# EAGLE board nutzen_05_mil (EAGLE 9.6.2), part 1 of 2
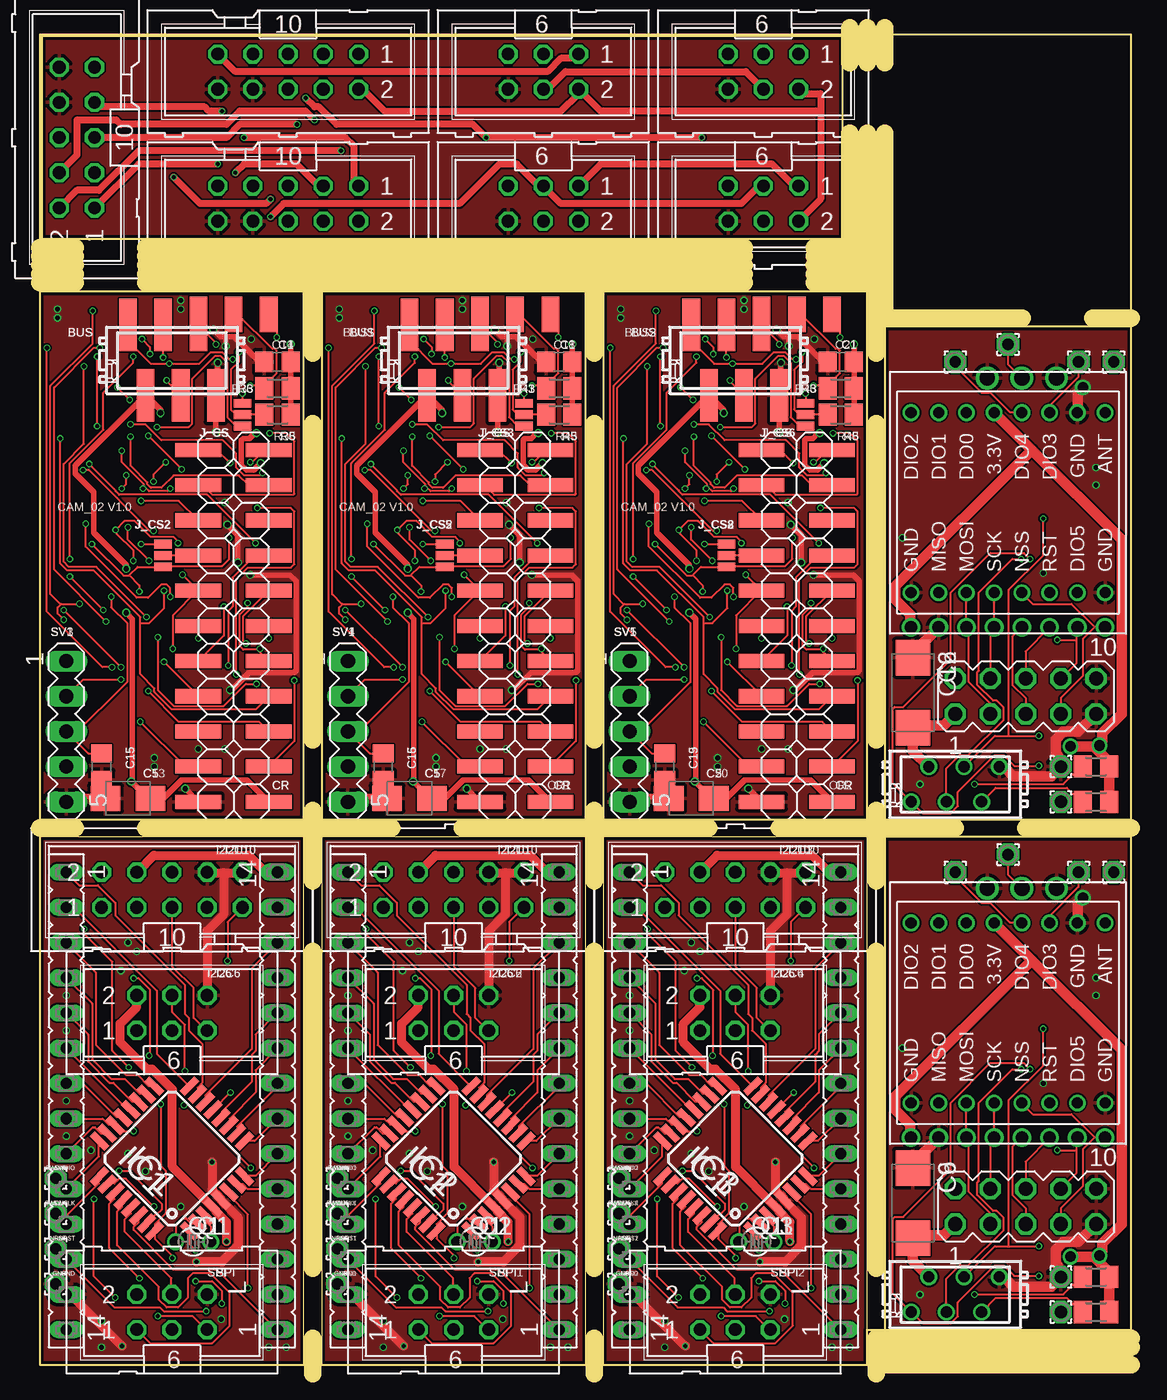
[diagram p0: board, top side]
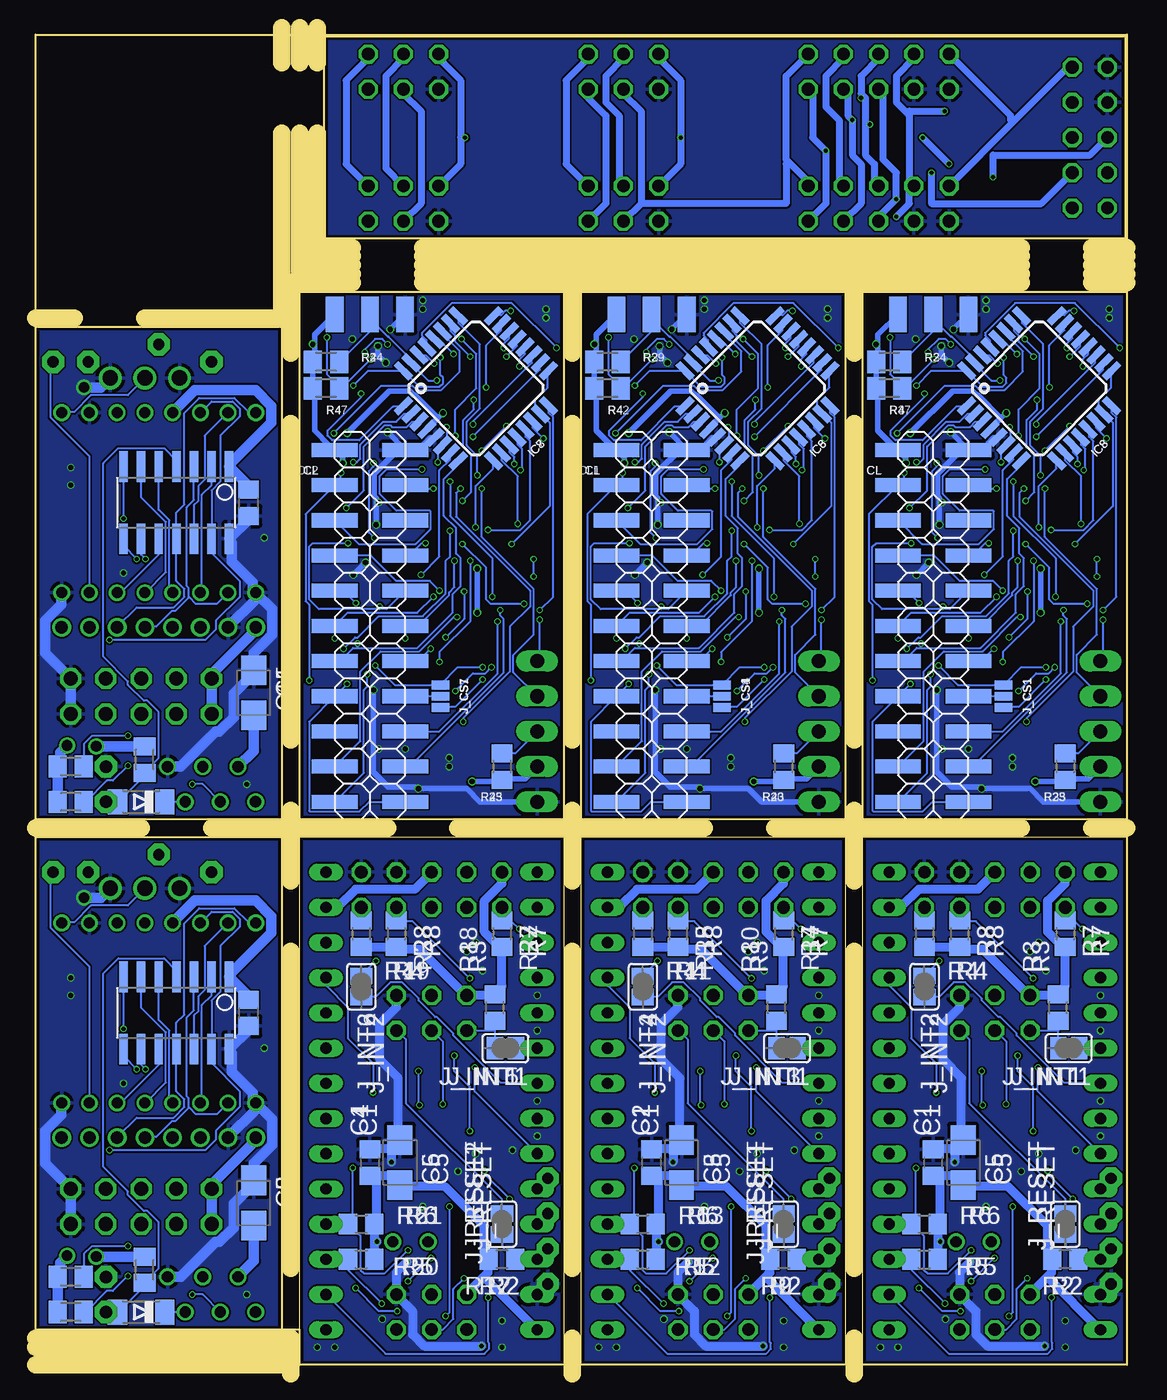
[diagram p1: board, bottom side, seen from below]

Size 78.74 x 96.01 mm. Coordinates in mm from the lower left corner, seen from the top.
Outline: 0,0 0,38.1 19.05,38.1 19.05,0 0,0
Outline: 59.69,0 40.64,0 40.64,38.1 59.69,38.1 59.69,2.54
Outline: 78.74,38.1 78.74,2.54 60.96,2.54
Outline: 78.74,38.1 60.96,38.1 60.96,2.54
Outline: 78.74,39.37 78.74,74.93 60.96,74.93
Outline: 60.96,74.93 60.96,39.37 78.74,39.37
Outline: 0,39.37 19.05,39.37 19.05,77.47 0,77.47
Outline: 0,77.47 0,39.37
Outline: 59.69,77.47 59.69,39.37 40.64,39.37 40.64,77.47 57.91,77.47
Outline: 59.69,77.47 57.91,77.47
Outline: 57.91,81.28 0.13,81.28 0.13,95.89
Outline: 57.91,81.28 57.91,95.89 0.13,95.89
Outline: 0,0 59.69,0
Outline: 59.69,0 59.69,2.54
Outline: 59.69,2.54 60.96,2.54
Outline: 78.74,38.1 78.74,39.37
Outline: 60.96,74.93 60.96,77.47 59.69,77.47
Outline: 57.91,77.47 57.91,81.28
Outline: 0.13,95.89 0,95.89
Outline: 0,95.89 0,77.47
Outline: 0,39.37 0,0
Outline: 59.69,0 78.74,0 78.74,96.01 0,96.01 0,95.89
Outline: 39.37,38.1 20.32,38.1 20.32,0 39.37,0 39.37,38.1
Outline: 20.32,39.37 39.37,39.37 39.37,77.47 20.32,77.47 20.32,39.37
Copper layers (1*16): Top 0.035559375mm / dielectric 1.6mm / Bottom 0.035559375mm
Design rules "jlcpcb2layer": minimum track width 5mil, minimum drill 12mil, track to track 5mil, track to pad 5mil, pad to pad 5mil, via to via 5mil, smd to smd 5mil, copper to edge 8mil, drill to drill 6mil, minimum pad ring 5mil, minimum via ring 3mil, stop-mask expansion 2.5mil, vias tented up to drill 0mil, thermal gap 10mil
Net classes: 1 GND: width 0.635 mm; 2 Power: width 0.635 mm
Milling: 46 lines

## Footprints (pad centres in the part's own frame; a part is rotated, then mirrored left to right if it is on the bottom)
MICROMATCH-6SMD = smd 1.27 x 3.81: 1 3.175,-2.54; 2 1.905,2.54; 3 0.635,-2.54; 4 -0.635,2.54; 5 -1.905,-2.54; 6 -3.175,2.54
C0805 = smd 1.3 x 1.5: 1 -0.95,0; 2 0.95,0
B/3528-21W = smd 2.15 x 1.8: + 1.625,0; - -1.625,0
C/6032-28R = smd 2.55 x 2.5: + 2.525,0; - -2.525,0
2X11SMD = smd 1.016 x 3.302: 1 -1.27,-3.81; 2 -1.27,1.27; 3 1.27,-3.81; 4 1.27,1.27; 5 3.81,-3.81; 6 3.81,1.27; 7 6.35,-3.81; 8 6.35,1.27; 9 8.89,-3.81; 10 8.89,1.27; 11 11.43,-3.81; 12 11.43,1.27; 13 13.97,-3.81; 14 13.97,1.27; 15 16.51,-3.81; 16 16.51,1.27; 17 19.05,-3.81; 18 19.05,1.27; 19 21.59,-3.81; 20 21.59,1.27; 21 24.13,-3.81; 22 24.13,1.27
MINIMELF = smd 1.4 x 1.8: A 1.7,0; C -1.7,0
1,6/0,9 = drill 0.914 pad 1.6 octagon: 1 0,0
1,6/0,8 = drill 0.813 pad 1.6 octagon: 1 0,0
ML10 = drill 0.914 octagon: 1 -5.08,-1.27; 2 -5.08,1.27; 3 -2.54,-1.27; 4 -2.54,1.27; 5 0,-1.27; 6 0,1.27; 7 2.54,-1.27; 8 2.54,1.27; 9 5.08,-1.27; 10 5.08,1.27
ML6 = drill 0.914 octagon: 1 -2.54,-1.27; 2 -2.54,1.27; 3 0,-1.27; 4 0,1.27; 5 2.54,-1.27; 6 2.54,1.27
LQFP-32 = smd 1.5 x 0.5: 1 -1.8,0; 2 -1.8,-0.8; 3 -1.8,-1.6; 4 -1.8,-2.4; 5 -1.8,-3.2; 6 -1.8,-4; 7 -1.8,-4.8; 8 -1.8,-5.6; 17 7.4,-5.6; 18 7.4,-4.8; 19 7.4,-4; 20 7.4,-3.2; 21 7.4,-2.4; 22 7.4,-1.6; 23 7.4,-0.8; 24 7.4,0 | smd 0.5 x 1.5: 9 0,-7.4; 10 0.8,-7.4; 11 1.6,-7.4; 12 2.4,-7.4; 13 3.2,-7.4; 14 4,-7.4; 15 4.8,-7.4; 16 5.6,-7.4; 25 5.6,1.8; 26 4.8,1.8; 27 4,1.8; 28 3.2,1.8; 29 2.4,1.8; 30 1.6,1.8; 31 0.8,1.8; 32 0,1.8
SOIC14 = smd 0.61 x 2.21: 1 -3.81,-2.603; 2 -2.54,-2.603; 3 -1.27,-2.603; 4 0,-2.603; 5 1.27,-2.603; 6 2.54,-2.603; 7 3.81,-2.603; 8 3.81,2.603; 9 2.54,2.603; 10 1.27,2.603; 11 0,2.603; 12 -1.27,2.603; 13 -2.54,2.603; 14 -3.81,2.603
SMT-JUMPER_3_1-NC_PASTE_NO-SILK = smd 0.635 x 1.27: 1 -0.813,0; 2 0,0; 3 0.813,0
SJ = smd 1.168 x 1.6: 1 -0.762,0; 2 0.762,0
FE14 = drill 0.813 long: 1 -15.24,0; 2 -12.7,0; 3 -10.16,0; 4 -7.62,0; 5 -5.08,0; 6 -2.54,0; 7 0,0; 8 2.54,0; 9 5.08,0; 10 7.62,0; 11 10.16,0; 12 12.7,0; 13 15.24,0; 14 17.78,0
SMD1,27-2,54 = smd 1.27 x 2.54: 1 0,0
TC26V = drill 0.813: 1 -1.27,0; 2 1.27,0
R0805 = smd 1.3 x 1.5: 1 -0.95,0; 2 0.95,0
M0805 = smd 1.3 x 1.6: 1 -0.95,0; 2 0.95,0
MA05-2 = drill 1.016 octagon: 1 -5.08,-1.27; 2 -5.08,1.27; 3 -2.54,-1.27; 4 -2.54,1.27; 5 0,-1.27; 6 0,1.27; 7 2.54,-1.27; 8 2.54,1.27; 9 5.08,-1.27; 10 5.08,1.27
MA05-1 = drill 1.016 long: 1 -5.08,0; 2 -2.54,0; 3 0,0; 4 2.54,0; 5 5.08,0
CC1101 = drill 1.1: ANT 9,-1; GND1 9,-3.5; GND2 9,1.5 | drill 0.9: CSN -9,-7; GDO0 -9,-5; GDO2 -9,-3; GND0 -9,5; SCLK -9,1; SI -9,3; SO -9,-1; VCC -9,7
WIRELESS-LORA-RFM95W#THT = drill 0.8: A1 -6.5,7; A2 -6.5,5; A3 -6.5,3; A4 -6.5,1; A5 -6.5,-1; A6 -6.5,-3; A7 -6.5,-5; A8 -6.5,-7; B1 6.5,7; B2 6.5,5; B3 6.5,3; B4 6.5,1; B5 6.5,-1; B6 6.5,-3; B7 6.5,-5; B8 6.5,-7
MICROMATCH-6 = drill 0.813: 1 3.175,1.27; 2 1.905,-1.27; 3 0.635,1.27; 4 -0.635,-1.27; 5 -1.905,1.27; 6 -3.175,-1.27

## Placement (x,y rotation side)
BUS  [MICROMATCH-6SMD]  9.53,72.52 180 top
BUS1  [MICROMATCH-6SMD]  29.84,72.52 180 top
BUS2  [MICROMATCH-6SMD]  50.16,72.52 180 top
C1  [C0805]  13.97,14.61 90 bottom
C2  [C0805]  34.29,14.61 90 bottom
C3  [B/3528-21W]  32.13,14.61 270 bottom
C4  [C0805]  54.61,14.61 90 bottom
C5  [B/3528-21W]  11.81,14.61 270 bottom
C6  [B/3528-21W]  52.45,14.61 270 bottom
C7  100n  [C0805]  63.37,25.4 270 bottom
C8  10u  [B/3528-21W]  62.99,11.68 270 bottom
C9  [C/6032-28R]  62.99,11.68 270 top
C10  100n  [C0805]  63.37,62.23 270 bottom
C11  10u  [B/3528-21W]  62.99,48.51 270 bottom
C12  [C/6032-28R]  62.99,48.51 270 top
C13  10u  [B/3528-21W]  6.35,40.89 0 top
C14  0.1  [C0805]  17.14,72.39 180 top
C15  0.1  [C0805]  4.45,43.18 270 top
C16  0.1  [C0805]  24.77,43.18 270 top
C17  10u  [B/3528-21W]  26.67,40.89 0 top
C18  0.1  [C0805]  37.47,72.39 180 top
C19  0.1  [C0805]  45.09,43.18 270 top
C20  10u  [B/3528-21W]  46.99,40.89 0 top
C21  0.1  [C0805]  57.78,72.39 180 top
CL  [2X11SMD]  12.7,64.77 270 bottom
CL1  [2X11SMD]  33.02,64.77 270 bottom
CL2  [2X11SMD]  53.34,64.77 270 bottom
CR  [2X11SMD]  12.7,41.91 90 top
CR1  [2X11SMD]  33.02,41.91 90 top
CR2  [2X11SMD]  53.34,41.91 90 top
D1  [MINIMELF]  71.12,40.64 180 bottom
D2  [MINIMELF]  71.12,3.81 180 bottom
DW  [1,6/0,9]  73.66,3.81 90 top
DW1  [1,6/0,9]  73.66,40.64 90 top
GND  [1,6/0,8]  1.14,5.84 180 top
GND1  [1,6/0,8]  21.46,5.84 180 top
GND2  [1,6/0,8]  41.78,5.84 180 top
GND_  [1,6/0,9]  73.66,6.35 90 top
GND_1  [1,6/0,9]  73.66,43.18 90 top
I2C1  [ML10]  29.84,34.29 0 top
I2C2  [ML6]  29.84,25.4 0 top
I2C3  [ML10]  50.16,34.29 0 top
I2C4  [ML6]  50.16,25.4 0 top
I2C6  [ML6]  9.53,25.4 0 top
I2C10  [ML10]  9.53,34.29 0 top
IC1  STM32G071  [LQFP-32]  9.53,10.92 135 top
IC2  STM32G071  [LQFP-32]  29.84,10.92 135 top
IC3  STM32G071  [LQFP-32]  50.16,10.92 135 top
IC4  TINY84 or TINY841  [SOIC14]  68.58,25.4 180 bottom
IC5  TINY84 or TINY841  [SOIC14]  68.58,62.23 180 bottom
IC6  STM32G071KBT6N  [LQFP-32]  30.61,70.48 45 bottom
IC7  STM32G071KBT6N  [LQFP-32]  50.93,70.48 45 bottom
IC8  STM32G071KBT6N  [LQFP-32]  10.29,70.48 45 bottom
J_CS  [SMT-JUMPER_3_1-NC_PASTE_NO-SILK]  14.61,68.58 270 top
J_CS1  [SMT-JUMPER_3_1-NC_PASTE_NO-SILK]  8.89,48.26 90 bottom
J_CS2  [SMT-JUMPER_3_1-NC_PASTE_NO-SILK]  8.89,58.42 270 top
J_CS3  [SMT-JUMPER_3_1-NC_PASTE_NO-SILK]  34.92,68.58 270 top
J_CS4  [SMT-JUMPER_3_1-NC_PASTE_NO-SILK]  29.21,48.26 90 bottom
J_CS5  [SMT-JUMPER_3_1-NC_PASTE_NO-SILK]  29.21,58.42 270 top
J_CS6  [SMT-JUMPER_3_1-NC_PASTE_NO-SILK]  55.24,68.58 270 top
J_CS7  [SMT-JUMPER_3_1-NC_PASTE_NO-SILK]  49.53,48.26 90 bottom
J_CS8  [SMT-JUMPER_3_1-NC_PASTE_NO-SILK]  49.53,58.42 270 top
J_INT1  [SJ]  4.19,22.86 0 bottom
J_INT2  [SJ]  14.61,27.3 270 bottom
J_INT3  [SJ]  24.51,22.86 0 bottom
J_INT4  [SJ]  34.92,27.3 270 bottom
J_INT5  [SJ]  44.83,22.86 0 bottom
J_INT6  [SJ]  55.24,27.3 270 bottom
J_RESET  [SJ]  4.45,10.16 270 bottom
J_RESET1  [SJ]  24.77,10.16 270 bottom
J_RESET2  [SJ]  45.09,10.16 270 bottom
L  [FE14]  17.14,17.78 90 top
L1  [FE14]  37.47,17.78 90 top
L2  [FE14]  57.78,17.78 90 top
NRST  [1,6/0,8]  1.14,8.38 180 top
NRST1  [1,6/0,8]  21.46,8.38 180 top
NRST2  [1,6/0,8]  41.78,8.38 180 top
PAD1  [1,6/0,8]  69.85,36.83 90 top
PAD2  [1,6/0,8]  74.93,35.56 90 top
PAD3  [1,6/0,8]  66.04,35.56 90 top
PAD4  [1,6/0,8]  77.47,35.56 90 top
PAD5  [1,6/0,8]  69.85,73.66 90 top
PAD6  [1,6/0,8]  74.93,72.39 90 top
PAD7  [1,6/0,8]  66.04,72.39 90 top
PAD8  [1,6/0,8]  77.47,72.39 90 top
PAD9  [SMD1,27-2,54]  16.51,75.82 0 top
PAD10  [SMD1,27-2,54]  16.51,75.82 0 bottom
PAD11  [SMD1,27-2,54]  13.97,75.82 0 top
PAD12  [SMD1,27-2,54]  13.97,75.82 0 bottom
PAD13  [SMD1,27-2,54]  11.43,75.82 0 top
PAD14  [SMD1,27-2,54]  11.43,75.82 0 bottom
PAD15  [SMD1,27-2,54]  36.83,75.82 0 top
PAD16  [SMD1,27-2,54]  36.83,75.82 0 bottom
PAD17  [SMD1,27-2,54]  34.29,75.82 0 top
PAD18  [SMD1,27-2,54]  34.29,75.82 0 bottom
PAD19  [SMD1,27-2,54]  31.75,75.82 0 top
PAD20  [SMD1,27-2,54]  31.75,75.82 0 bottom
PAD21  [SMD1,27-2,54]  57.15,75.82 0 top
PAD22  [SMD1,27-2,54]  57.15,75.82 0 bottom
PAD23  [SMD1,27-2,54]  54.61,75.82 0 top
PAD24  [SMD1,27-2,54]  54.61,75.82 0 bottom
PAD25  [SMD1,27-2,54]  52.07,75.82 0 top
PAD26  [SMD1,27-2,54]  52.07,75.82 0 bottom
Q1  [TC26V]  11.05,8.89 180 top
Q2  [TC26V]  31.37,8.89 180 top
Q3  [TC26V]  51.69,8.89 180 top
R  [FE14]  1.91,20.32 270 top
R1  [FE14]  22.23,20.32 270 top
R2  [R0805]  4.45,7.62 180 bottom
R3  [R0805]  4.95,25.78 90 bottom
R4  [R0805]  14.61,31.11 270 bottom
R5  [R0805]  14.61,7.62 0 bottom
R6  [R0805]  14.61,10.16 0 bottom
R7  [R0805]  4.45,31.11 270 bottom
R8  [R0805]  12.06,31.11 270 bottom
R9  [R0805]  24.77,7.62 180 bottom
R10  [R0805]  25.27,25.78 90 bottom
R11  [R0805]  34.92,31.11 270 bottom
R12  [R0805]  34.92,7.62 0 bottom
R13  [R0805]  34.92,10.16 0 bottom
R14  [R0805]  24.77,31.11 270 bottom
R15  [R0805]  32.38,31.11 270 bottom
R16  [FE14]  42.55,20.32 270 top
R17  [R0805]  45.09,7.62 180 bottom
R18  [R0805]  45.59,25.78 90 bottom
R19  [R0805]  55.24,31.11 270 bottom
R20  [R0805]  55.24,7.62 0 bottom
R21  [R0805]  55.24,10.16 0 bottom
R22  [R0805]  45.09,31.11 270 bottom
R23  [R0805]  52.7,31.11 270 bottom
R24  10k  [M0805]  70.87,6.86 270 bottom
R25  10k  [M0805]  76.2,6.35 0 bottom
R26  10k  [M0805]  76.2,6.35 180 top
R27  10k  [M0805]  76.2,3.81 0 bottom
R28  10k  [M0805]  76.2,3.81 180 top
R29  10k  [M0805]  70.87,43.69 270 bottom
R30  10k  [M0805]  76.2,43.18 0 bottom
R31  10k  [M0805]  76.2,43.18 180 top
R32  10k  [M0805]  76.2,40.64 0 bottom
R33  10k  [M0805]  76.2,40.64 180 top
R34  10k  [M0805]  17.14,72.39 0 bottom
R35  100K  [R0805]  4.45,43.18 270 bottom
R36  10k  [M0805]  17.14,70.48 180 top
R37  10k  [M0805]  17.14,70.48 0 bottom
R38  10k  [M0805]  17.14,68.58 180 top
R39  10k  [M0805]  37.47,72.39 0 bottom
R40  100K  [R0805]  24.77,43.18 270 bottom
R41  10k  [M0805]  37.47,70.48 180 top
R42  10k  [M0805]  37.47,70.48 0 bottom
R43  10k  [M0805]  37.47,68.58 180 top
R44  10k  [M0805]  57.78,72.39 0 bottom
R45  100K  [R0805]  45.09,43.18 270 bottom
R46  10k  [M0805]  57.78,70.48 180 top
R47  10k  [M0805]  57.78,70.48 0 bottom
R48  10k  [M0805]  57.78,68.58 180 top
SPI  [ML6]  9.53,3.81 0 top
SPI1  [ML6]  29.84,3.81 0 top
SPI2  [ML6]  50.16,3.81 0 top
SV1  [MA05-2]  71.12,11.43 0 top
SV2  [MA05-2]  71.12,48.26 0 top
SV3  [MA05-1]  1.91,45.72 270 top
SV4  [MA05-1]  22.23,45.72 270 top
SV5  [MA05-1]  42.55,45.72 270 top
SV6  [ML6]  52.2,83.82 180 top
SV7  [ML6]  36.32,93.34 180 top
SV8  [ML10]  2.67,88.58 90 top
SV9  [ML10]  17.91,83.82 180 top
SV10  [ML6]  36.32,83.82 180 top
SV11  [ML10]  17.91,93.34 180 top
SV12  [ML6]  52.2,93.34 180 top
SWCLK  [1,6/0,8]  1.14,10.92 180 top
SWCLK1  [1,6/0,8]  21.46,10.92 180 top
SWCLK2  [1,6/0,8]  41.78,10.92 180 top
SWDIO  [1,6/0,8]  1.14,13.46 180 top
SWDIO1  [1,6/0,8]  21.46,13.46 180 top
SWDIO2  [1,6/0,8]  41.78,13.46 180 top
U$1  CC1101  [CC1101]  69.85,25.4 90 top
U$2  CC1101  [CC1101]  69.85,62.23 90 top
U$3  WIRELESS-LORA-RFM95W#THT  [WIRELESS-LORA-RFM95W#THT]  69.85,25.4 90 top
U$4  WIRELESS-LORA-RFM95W#THT  [WIRELESS-LORA-RFM95W#THT]  69.85,62.23 90 top
X1  BUS  [MICROMATCH-6]  66.04,5.08 180 top
X2  BUS  [MICROMATCH-6]  66.04,41.91 180 top

## Library data of the parts
BUS BUS1 BUS2 = con-amp-micromatch
C1-C6 C8 C9 C11-C13 C17 C20 = rcl; SPICEPREFIX: C
C7 C10 C14-C16 C18 C19 C21 R35 R40 R45 = rcl
CL CL1 CL2 CR CR1 CR2 = pinhead-1
D1 D2 = diode
DW DW1 GND GND1 GND2 GND_ GND_1 NRST NRST1 NRST2 PAD1-PAD26 SWCLK SWCLK1 SWCLK2 SWDIO SWDIO1 SWDIO2 = wirepad
I2C1-I2C4 I2C6 I2C10 SPI SPI1 SPI2 SV6-SV12 = con-harting-ml; OC_FARNELL: unknown; OC_NEWARK: unknown
IC1-IC3 IC6-IC8 = STM32
IC4 IC5 = avr-7
J_CS J_CS1-J_CS8 = SparkFun-Jumpers
J_INT1-J_INT6 J_RESET J_RESET1 J_RESET2 = jumper
L L1 L2 R R1 R16 = con-lsta-my
Q1-Q3 = crystal; OC_FARNELL: unknown; OC_NEWARK: unknown
R2-R15 R17-R34 R36-R39 R41-R44 R46-R48 = rcl; SPICEPREFIX: R
SV1-SV5 = con-lstb; OC_FARNELL: unknown; OC_NEWARK: unknown
U$1 U$2 = modules
U$3 U$4 = diy-modules
X1 X2 = con-amp-micromatch; MPN: 7-215464-6; OC_FARNELL: 3784630; OC_NEWARK: 19R8125

## Nets
BUS_INT: IC4.8 R27.2 X1.1
BUS_INT1: IC5.8 R32.2 X2.1
BUS_P1: BUS1.5 J_CS3.2 PAD19.1 R43.2
BUS_P2: BUS2.5 J_CS6.2 PAD25.1 R48.2
BUS_P5: BUS.5 J_CS.2 PAD13.1 R38.2
BUS_RESET: I2C6.5 I2C10.5 J_RESET.1
BUS_RESET1: I2C1.5 I2C2.5 J_RESET1.1
BUS_RESET2: I2C3.5 I2C4.5 J_RESET2.1
BUS_RESET3: D2.C R28.2 X1.5
BUS_RESET4: D1.C R33.2 X2.5
BUS_SCL: IC4.9 R26.2 X1.3
BUS_SCL1: IC5.9 R31.2 X2.3
BUS_SDA: IC4.7 R25.2 X1.4
BUS_SDA1: IC5.7 R30.2 X2.4
C_D0: CL.14 CR.14 IC8.7
C_D1: CL.13 CR.13 IC8.8
C_D2: CL.12 CR.12 IC8.9
C_D3: CL.11 CR.11 IC8.10
C_D4: CL.10 CR.10 IC8.11
C_D5: CL.9 CR.9 IC8.12
C_D6: CL.8 CR.8 IC8.13
C_D7: CL.7 CR.7 IC8.14
C_D8: CL1.7 CR1.7 IC6.14
C_D9: CL1.8 CR1.8 IC6.13
C_D10: CL1.9 CR1.9 IC6.12
C_D11: CL1.10 CR1.10 IC6.11
C_D12: CL1.11 CR1.11 IC6.10
C_D13: CL1.12 CR1.12 IC6.9
C_D14: CL1.13 CR1.13 IC6.8
C_D15: CL1.14 CR1.14 IC6.7
C_D16: CL2.7 CR2.7 IC7.14
C_D17: CL2.8 CR2.8 IC7.13
C_D18: CL2.9 CR2.9 IC7.12
C_D19: CL2.10 CR2.10 IC7.11
C_D20: CL2.11 CR2.11 IC7.10
C_D21: CL2.12 CR2.12 IC7.9
C_D22: CL2.13 CR2.13 IC7.8
C_D23: CL2.14 CR2.14 IC7.7
CL_OE: CL.20 IC8.26
CL_OE1: CL1.20 IC6.26
CL_OE2: CL2.20 IC7.26
CL_PWDN: CL.16 J_CS1.2
CL_PWDN1: CL1.16 J_CS4.2
CL_PWDN2: CL2.16 J_CS7.2
CL_RCK: CL.18 IC8.22
CL_RCK1: CL1.18 IC6.22
CL_RCK2: CL2.18 IC7.22
CL_RST: CL.15 CL.22 CR.22 IC8.15 IC8.17 J_CS2.3
CL_RST1: CL1.15 CL1.22 CR1.22 IC6.15 IC6.17 J_CS5.3
CL_RST2: CL2.15 CL2.22 CR2.22 IC7.15 IC7.17 J_CS8.3
CL_VSYNC: CL.5 IC8.28
CL_VSYNC1: CL1.5 IC6.28
CL_VSYNC2: CL2.5 IC7.28
CL_WR: CL.19 IC8.20
CL_WR1: CL1.19 IC6.20
CL_WR2: CL2.19 IC7.20
CL_WRST: CL.21 IC8.3
CL_WRST1: CL1.21 IC6.3
CL_WRST2: CL2.21 IC7.3
CR_OE: CR.20 IC8.27
CR_OE1: CR1.20 IC6.27
CR_OE2: CR2.20 IC7.27
CR_PWDN: CR.16 J_CS2.2
CR_PWDN1: CR1.16 J_CS5.2
CR_PWDN2: CR2.16 J_CS8.2
CR_RCK: CR.18 IC8.23
CR_RCK1: CR1.18 IC6.23
CR_RCK2: CR2.18 IC7.23
CR_RST: CR.15 IC8.16 J_CS1.3
CR_RST1: CR1.15 IC6.16 J_CS4.3
CR_RST2: CR2.15 IC7.16 J_CS7.3
CR_VSYNC: CR.5 IC8.29
CR_VSYNC1: CR1.5 IC6.29
CR_VSYNC2: CR2.5 IC7.29
CR_WR: CR.19 IC8.18
CR_WR1: CR1.19 IC6.18
CR_WR2: CR2.19 IC7.18
CR_WRST: CR.21 IC8.2
CR_WRST1: CR1.21 IC6.2
CR_WRST2: CR2.21 IC7.2
CS0: IC4.6 SV1.7 U$1.CSN U$3.A5
CS1: IC5.6 SV2.7 U$2.CSN U$4.A5
DW: D2.A DW.1 IC4.4 R24.2
DW1: D1.A DW1.1 IC5.4 R29.2
FON: SV8.3 SV9.3 SV11.3
FON1: I2C1.3
FON2: I2C10.3
FON3: I2C3.3
GND [GND]: C1.2 C5.- GND.1 I2C6.6 I2C10.8 I2C10.10 IC1.5 R.13 SPI.6
GND1 [GND]: C2.2 C3.- GND1.1 I2C1.8 I2C1.10 I2C2.6 IC2.5 R1.13 SPI1.6
GND2 [GND]: C4.2 C6.- GND2.1 I2C3.8 I2C3.10 I2C4.6 IC3.5 R16.13 SPI2.6
GND3 [GND]: C7.2 C8.- C9.- GND_.1 IC4.14 SV1.9 SV1.10 U$1.GND0 U$1.GND1 U$1.GND2 U$3.A1 U$3.A8 U$3.B7 X1.6
GND4 [GND]: C10.2 C11.- C12.- GND_1.1 IC5.14 SV2.9 SV2.10 U$2.GND0 U$2.GND1 U$2.GND2 U$4.A1 U$4.A8 U$4.B7 X2.6
GND5 [GND]: BUS.6 C13.- C14.2 C15.2 CL.2 CR.2 IC8.5 PAD14.1 SV3.5
GND6 [GND]: BUS1.6 C16.2 C17.- C18.2 CL1.2 CR1.2 IC6.5 PAD20.1 SV4.5
GND7 [GND]: BUS2.6 C19.2 C20.- C21.2 CL2.2 CR2.2 IC7.5 PAD26.1 SV5.5
GND8: SV6.6 SV7.6 SV8.8 SV8.10 SV9.8 SV9.10 SV10.6 SV11.8 SV11.10 SV12.6
GPIO0: IC4.13 SV1.8 U$1.GDO0 U$3.B3
GPIO1: IC4.12 U$3.B2
GPIO2: IC4.11 SV1.6 U$1.GDO2 U$3.B1
GPIO3: IC5.13 SV2.8 U$2.GDO0 U$4.B3
GPIO4: IC5.11 SV2.6 U$2.GDO2 U$4.B1
GPIO5: IC5.12 U$4.B2
INT: SV6.1 SV7.1 SV8.9 SV9.9 SV10.1 SV11.9 SV12.1
INT1: I2C6.1 J_INT1.1 R3.1
INT2: I2C10.9 J_INT2.1 R4.1
INT3: I2C2.1 J_INT3.1 R10.1
INT4: I2C1.9 J_INT4.1 R11.1
INT5: I2C4.1 J_INT5.1 R18.1
INT6: I2C3.9 J_INT6.1 R19.1
MISO: IC4.3 SV1.5 U$1.SO U$3.A2
MISO1: IC5.3 SV2.5 U$2.SO U$4.A2
MOSI: IC4.2 SV1.3 U$1.SI U$3.A3
MOSI1: IC5.2 SV2.3 U$2.SI U$4.A3
N$1: IC2.2 Q2.2
N$2: IC2.3 Q2.1
N$3: IC3.2 Q3.2
N$4: IC3.3 Q3.1
N$5: PAD1.1 U$1.ANT U$3.B8
N$6: PAD2.1 U$3.B6
N$7: PAD3.1 U$3.B5
N$8: PAD4.1 U$3.A7
N$9: PAD5.1 U$2.ANT U$4.B8
N$10: PAD6.1 U$4.B6
N$11: PAD7.1 U$4.B5
N$12: PAD8.1 U$4.A7
N$30: IC1.2 Q1.2
N$31: IC1.3 Q1.1
NRST: IC1.6 J_RESET.2 NRST.1 R2.1 R.12
NRST1: IC2.6 J_RESET1.2 NRST1.1 R1.12 R9.1
NRST2: IC3.6 J_RESET2.2 NRST2.1 R16.12 R17.1
PA0: IC1.7 L.5
PA1: IC1.8 L.6
PA2: IC1.9 L.7
PA3: IC1.10 L.8
PA4: IC1.11 L.9
PA5: IC1.12 L.10
PA6: IC1.13 L.11
PA7: IC1.14 L.12
PA8: IC1.18 R.4
PA9: IC1.19 R.5
PA10: IC1.21 J_INT2.2 R.7
PA11: IC2.7 L1.5
PA12: IC2.8 L1.6
PA13: IC2.9 L1.7
PA14: IC2.10 L1.8
PA15: IC2.11 L1.9
PA16: IC2.12 L1.10
PA17: IC2.18 R1.4
PA18: IC2.19 R1.5
PA19: IC2.13 L1.11
PA20: IC2.14 L1.12
PA21: IC2.21 J_INT4.2 R1.7
PA22: IC3.7 L2.5
PA23: IC3.8 L2.6
PA24: IC3.9 L2.7
PA25: IC3.10 L2.8
PA26: IC3.11 L2.9
PA27: IC3.12 L2.10
PA28: IC3.18 R16.4
PA29: IC3.19 R16.5
PA30: IC3.13 L2.11
PA31: IC3.14 L2.12
PA32: IC3.21 J_INT6.2 R16.7
PB0: IC1.15 R.1
PB1: IC1.16 R.2
PB2: IC2.16 R1.2
PB3: IC2.17 R1.3
PB4: IC2.30 L1.1
PB5: IC2.15 R1.1
PB6: IC1.30 L.1
PB7: IC1.31 L.2
PB8: IC2.31 L1.2
PB9: IC3.16 R16.2
PB10: IC3.17 R16.3
PB11: IC3.30 L2.1
PB12: IC3.15 R16.1
PB13: IC3.31 L2.2
PB15: IC1.17 R.3
PC1: IC2.20 J_INT3.2 R1.6
PC2: IC3.20 J_INT5.2 R16.6
PC6: IC1.20 J_INT1.2 R.6
RESET: SV6.5 SV7.5 SV8.5 SV9.5 SV10.5 SV11.5 SV12.5
RESOUT: IC4.10 U$3.A6
RESOUT1: IC5.10 U$4.A6
SCK: IC4.5 SV1.4 U$1.SCLK U$3.A4
SCK1: IC5.5 SV2.4 U$2.SCLK U$4.A4
SCL: CL.3 CR.3 IC8.19
SCL1: I2C6.3 IC1.32 L.3 R5.1
SCL2: I2C10.7 IC1.22 R8.1 R.8
SCL3: I2C2.3 IC2.32 L1.3 R12.1
SCL4: I2C1.7 IC2.22 R1.8 R15.1
SCL5: I2C4.3 IC3.32 L2.3 R20.1
SCL6: I2C3.7 IC3.22 R16.8 R23.1
SCL7: CL1.3 CR1.3 IC6.19
SCL8: CL2.3 CR2.3 IC7.19
SCL9: SV6.3 SV7.3 SV8.7 SV9.7 SV10.3 SV11.7 SV12.3
SDA: CL.4 CR.4 IC8.21
SDA1: I2C6.4 IC1.1 L.4 R6.1
SDA2: I2C10.1 IC1.23 R7.1 R.9
SDA3: I2C2.4 IC2.1 L1.4 R13.1
SDA4: I2C1.1 IC2.23 R1.9 R14.1
SDA5: I2C4.4 IC3.1 L2.4 R21.1
SDA6: I2C3.1 IC3.23 R16.9 R22.1
SDA7: CL1.4 CR1.4 IC6.21
SDA8: CL2.4 CR2.4 IC7.21
SDA9: SV6.4 SV7.4 SV8.1 SV9.1 SV10.4 SV11.1 SV12.4
SPI1_MISO: IC1.28 SPI.1
SPI1_MISO1: IC2.28 SPI1.1
SPI1_MISO2: IC3.28 SPI2.1
SPI1_MOSI: IC1.29 SPI.4
SPI1_MOSI1: IC2.29 SPI1.4
SPI1_MOSI2: IC3.29 SPI2.4
SPI1_SCK: IC1.27 SPI.3
SPI1_SCK1: IC2.27 SPI1.3
SPI1_SCK2: IC3.27 SPI2.3
SPI1_SS: IC1.26 SPI.5
SPI1_SS1: IC2.26 SPI1.5
SPI1_SS2: IC3.26 SPI2.5
SPI_CS: IC8.1 J_CS.1
SPI_CS1: IC6.1 J_CS3.1
SPI_CS2: IC7.1 J_CS6.1
SPI_MISO: BUS.1 IC8.30 PAD9.1 R37.2
SPI_MISO1: BUS1.1 IC6.30 PAD15.1 R42.2
SPI_MISO2: BUS2.1 IC7.30 PAD21.1 R47.2
SPI_MOSI: BUS.4 IC8.31 PAD12.1 R34.2
SPI_MOSI1: BUS1.4 IC6.31 PAD18.1 R39.2
SPI_MOSI2: BUS2.4 IC7.31 PAD24.1 R44.2
SPI_SCK: BUS.3 IC8.32 PAD11.1 R36.2
SPI_SCK1: BUS1.3 IC6.32 PAD17.1 R41.2
SPI_SCK2: BUS2.3 IC7.32 PAD23.1 R46.2
SWCLK: IC1.25 R.11 SWCLK.1
SWCLK1: IC2.25 R1.11 SWCLK1.1
SWCLK2: IC3.25 R16.11 SWCLK2.1
SWCLK3: IC8.25 J_CS1.1 SV3.2
SWCLK4: IC6.25 J_CS4.1 SV4.2
SWCLK5: IC7.25 J_CS7.1 SV5.2
SWDIO: IC1.24 R.10 SWDIO.1
SWDIO1: IC2.24 R1.10 SWDIO1.1
SWDIO2: IC3.24 R16.10 SWDIO2.1
SWDIO3: IC8.24 J_CS2.1 SV3.1
SWDIO4: IC6.24 J_CS5.1 SV4.1
SWDIO5: IC7.24 J_CS8.1 SV5.1
SWRES: C15.1 IC8.6 J_CS.3 R35.1 SV3.3
SWRES1: C16.1 IC6.6 J_CS3.3 R40.1 SV4.3
SWRES2: C19.1 IC7.6 J_CS6.3 R45.1 SV5.3
U1 [Power]: I2C1.4 L1.14
U2 [Power]: I2C3.4 L2.14
U3.1 [Power]: BUS1.2 C17.+ C18.1 CL1.1 CR1.1 IC6.4 PAD16.1 R39.1 R40.2 R41.1 R42.1 R43.1 SV4.4
U3.2 [Power]: BUS2.2 C20.+ C21.1 CL2.1 CR2.1 IC7.4 PAD22.1 R44.1 R45.2 R46.1 R47.1 R48.1 SV5.4
U3.3 [Power]: BUS.2 C13.+ C14.1 CL.1 CR.1 IC8.4 PAD10.1 R34.1 R35.2 R36.1 R37.1 R38.1 SV3.4
U5 [Power]: I2C10.4 L.14
U14: SV8.4 SV9.4 SV11.4
U14SW: SV8.6 SV9.6 SV11.6
U33: SV6.2 SV7.2 SV8.2 SV9.2 SV10.2 SV11.2 SV12.2
UBAT [Power]: I2C10.6 L.13
UBAT1 [Power]: I2C1.6 L1.13
UBAT2 [Power]: I2C3.6 L2.13
VCC [Power]: C1.1 C5.+ I2C6.2 I2C10.2 IC1.4 R2.2 R3.2 R4.2 R5.2 R6.2 R7.2 R8.2 R.14 SPI.2
VCC1 [Power]: C2.1 C3.+ I2C1.2 I2C2.2 IC2.4 R1.14 R9.2 R10.2 R11.2 R12.2 R13.2 R14.2 R15.2 SPI1.2
VCC2 [Power]: C4.1 C6.+ I2C3.2 I2C4.2 IC3.4 R16.14 R17.2 R18.2 R19.2 R20.2 R21.2 R22.2 R23.2 SPI2.2
VCC3 [Power]: C7.1 C8.+ C9.+ IC4.1 R24.1 R25.1 R26.1 R27.1 R28.1 SV1.1 SV1.2 U$1.VCC U$3.B4 X1.2
VCC4 [Power]: C10.1 C11.+ C12.+ IC5.1 R29.1 R30.1 R31.1 R32.1 R33.1 SV2.1 SV2.2 U$2.VCC U$4.B4 X2.2

## Tracks (layer width: path | path; a pad name or v marks a point on that pad's centre or on a via)
BUS_INT  (via drill 0.3)
  Top 0.127: v72.07,6.41 70.29,6.41 69.53,7.18 68.9,7.18 66.23,4.51 66.23,3.49 65.72,2.98 63.69,2.98 X1.1 61.53,5.14 61.53,10.54 61.66,10.67 62.29,10.67 65.72,14.1 65.72,18.92 68.58,21.78 70.99,21.78 v71.44,21.34
  Bottom 0.127: R27.2 75.12,3.81 73.6,5.33 73.15,5.33 v72.07,6.41 | IC4.8 72.39,22.29 v71.44,21.34
BUS_INT1  (via drill 0.3)
  Top 0.127: v72.07,43.24 70.29,43.24 69.53,44.01 68.9,44.01 66.23,41.34 66.23,40.32 65.72,39.81 63.69,39.81 X2.1 61.53,41.97 61.53,47.37 61.66,47.5 62.29,47.5 65.72,50.93 65.72,55.75 68.58,58.61 70.99,58.61 v71.44,58.17
  Bottom 0.127: R32.2 75.12,40.64 73.6,42.16 73.15,42.16 v72.07,43.24 | IC5.8 72.39,59.12 v71.44,58.17
BUS_P1  (via drill 0.3)
  Top 0.127: R43.2 J_CS3.2 34.48,68.58 34.1,68.96 34.1,71.82 34.67,72.39 v34.67,73.09 | v33.02,73.66 33.02,73.79 BUS1.5 PAD19.1
  Bottom 0.127: v34.67,73.09 34.67,73.28 33.91,74.04 33.4,74.04 v33.02,73.66
BUS_P2  (via drill 0.3)
  Top 0.127: R48.2 J_CS6.2 54.8,68.58 54.42,68.96 54.42,71.82 54.99,72.39 v54.99,73.09 | v53.34,73.66 53.34,73.79 BUS2.5 PAD25.1
  Bottom 0.127: v54.99,73.09 54.99,73.28 54.23,74.04 53.72,74.04 v53.34,73.66
BUS_P5  (via drill 0.3)
  Top 0.127: R38.2 J_CS.2 14.16,68.58 13.78,68.96 13.78,71.82 14.35,72.39 v14.35,73.09 | v12.7,73.66 12.7,73.79 BUS.5 PAD13.1
  Bottom 0.127: v14.35,73.09 14.35,73.28 13.59,74.04 13.08,74.04 v12.7,73.66
BUS_RESET
  Top 0.127: I2C10.5 9.56,33 9.56,28.74 11.09,27.2 11.09,25.04 12,24.13 I2C6.5
  Bottom 0.127: J_RESET.1 4.46,11.98 11.37,18.89 11.37,23.5 12,24.13 I2C6.5
BUS_RESET1
  Top 0.127: I2C1.5 29.88,33 29.88,28.74 31.41,27.2 31.41,25.04 32.32,24.13 I2C2.5
  Bottom 0.127: J_RESET1.1 24.78,11.98 31.69,18.89 31.69,23.5 32.32,24.13 I2C2.5
BUS_RESET2
  Top 0.127: I2C3.5 50.2,33 50.2,28.74 51.73,27.2 51.73,25.04 52.64,24.13 I2C4.5
  Bottom 0.127: J_RESET2.1 45.1,11.98 52.01,18.89 52.01,23.5 52.64,24.13 I2C4.5
BUS_RESET3
  Top 0.127: R28.2 75.12,3.81 74.11,4.83 68.96,4.83 X1.5
  Bottom 0.127: X1.5 D2.C
BUS_RESET4
  Top 0.127: R33.2 75.12,40.64 74.11,41.66 68.96,41.66 X2.5
  Bottom 0.127: X2.5 D1.C
BUS_SCL  (via drill 0.3)
  Top 0.127: R26.2 75.12,6.35 73.85,5.08 v67.44,5.08 | v70.8,21.34 70.17,21.34 67.75,18.92 67.75,13.27 67.63,13.14 67.63,12.26 68.77,11.11 69.03,11.11 69.53,10.6 69.53,9.72 66.99,7.18 66.36,7.18 65.41,6.22 X1.3
  Bottom 0.127: v67.44,5.08 66.67,5.08 X1.3 | IC4.9 71.12,21.65 v70.8,21.34
BUS_SCL1  (via drill 0.3)
  Top 0.127: R31.2 75.12,43.18 73.85,41.91 v67.44,41.91 | v70.8,58.17 70.17,58.17 67.75,55.75 67.75,50.1 67.63,49.97 67.63,49.09 68.77,47.94 69.03,47.94 69.53,47.43 69.53,46.55 66.99,44.01 66.36,44.01 65.41,43.05 X2.3
  Bottom 0.127: v67.44,41.91 66.67,41.91 X2.3 | IC5.9 71.12,58.48 v70.8,58.17
BUS_SDA  (via drill 0.3)
  Top 0.127: 69.91,8.57 68.9,8.57 X1.4 | 69.91,8.57 v72.07,8.57 | v72.39,24.26 72.39,21.59 69.91,19.11 69.91,8.57
  Bottom 0.127: v72.07,8.57 74.68,8.57 75.25,8 R25.2 | v72.39,24.26 IC4.7
BUS_SDA1  (via drill 0.3)
  Top 0.127: 69.91,45.4 68.9,45.4 X2.4 | 69.91,45.4 v72.07,45.4 | v72.39,61.09 72.39,58.42 69.91,55.94 69.91,45.4
  Bottom 0.127: v72.07,45.4 74.68,45.4 75.25,44.83 R30.2 | v72.39,61.09 IC5.7
C_D0  (via drill 0.3)
  Top 0.127: v10.29,57.02 CR.14 11.37,55.88 9.59,54.1 v9.59,51.69
  Bottom 0.127: v10.29,57.02 8.95,58.36 8.95,64.58 8.19,65.34 8.19,65.79 IC8.7 | CL.14 10.48,50.8 v9.59,51.69
C_D1  (via drill 0.3)
  Top 0.127: CR.13 14.67,54.04 14.67,52.26 v14.86,52.07
  Bottom 0.127: 14.86,51.75 15.18,51.75 16.13,50.8 CL.13 | 14.86,51.75 10.54,51.75 8,54.29 8,55.63 7.43,56.2 7.43,58.23 7.75,58.55 7.75,60.39 8.64,61.28 8.64,63.94 7.62,64.96 7.62,65.22 IC8.8 | 14.86,51.75 v14.86,52.07
C_D2  (via drill 0.3)
  Top 0.127: v6.35,60.45 6.35,59.56 v7.87,58.04 | v11.43,52.45 CR.12
  Bottom 0.127: v6.35,60.45 6.35,63.44 5.08,64.71 5.08,65.22 IC8.9 | v7.87,58.04 7.87,56.13 8.26,55.75 8.26,55.56 10.48,53.34 CR.12 v11.43,52.45
C_D3  (via drill 0.3)
  Top 0.127: v3.3,60.71 3.3,59.05 6.99,55.37 7.81,55.37 8.76,56.33 9.14,56.33 9.4,56.07 v9.4,55.44 | v16.51,52.45 CR.11
  Bottom 0.127: v3.3,60.71 3.3,64.14 4.45,65.28 4.45,65.79 IC8.10 | v9.4,55.44 10.54,54.29 15.56,54.29 CR.11 v16.51,52.45
C_D4  (via drill 0.3)
  Top 0.127: v3.56,65.02 5.46,63.12 5.46,63.06 5.71,62.8 12.06,62.8 v15.56,59.31 | CR.10 13.27,52.64 v13.27,54.74
  Bottom 0.127: v3.56,65.02 3.56,65.53 3.87,65.85 3.87,66.36 IC8.11 | v15.56,59.31 18.1,59.31 18.35,59.05 18.35,55.24 17.65,54.55 13.27,54.55 | 13.27,54.55 12.76,54.55 CL.10 | 13.27,54.55 v13.27,54.74
C_D5  (via drill 0.3)
  Top 0.127: v3.11,64.58 3.56,64.58 7.94,60.2 v8.19,60.2 | 15.88,51.63 15.88,51.44 CR.9 | v14.99,54.99 14.99,54.74 14.41,54.17 14.41,51.88 14.67,51.63 15.88,51.63 | 15.88,51.63 v15.88,51.69
  Bottom 0.127: v3.11,64.58 2.98,64.71 2.98,66.1 3.3,66.42 3.3,66.93 IC8.12 | v8.19,60.2 8.19,58.36 8.51,58.04 8.51,55.69 10.16,54.04 13.34,54.04 14.86,52.51 15.05,52.51 v15.88,51.69 | CL.9 15.88,55.88 v14.99,54.99
C_D6  (via drill 0.3)
  Top 0.127: v9.97,59.31 9.97,59.44 9.65,59.75 8,59.75 6.86,60.9 6.1,60.9 v5.46,60.26 5.52,60.26 5.52,60.01 6.73,58.8 v6.73,58.04 | v8.95,50.74 CR.8
  Bottom 0.127: v5.46,60.26 3.11,60.26 2.41,60.96 2.41,66.67 2.73,66.99 2.73,67.5 IC8.13 | v9.97,59.31 10.22,59.31 11.11,58.42 CL.8 | v8.95,50.74 8.95,51.44 6.73,53.66 v6.73,58.04
C_D7  (via drill 0.3)
  Top 0.127: v1.46,66.86 1.46,57.85 1.97,57.34 3.87,57.34 7.24,53.98 7.24,53.53 | 7.24,53.53 7.24,49.85 8.26,48.83 8.26,48.58 9.53,47.31 15.56,47.31 CR.7 | v8.95,55.88 8.95,54.61 7.87,53.53 7.24,53.53
  Bottom 0.127: v1.46,66.86 2.22,67.63 IC8.14 | CL.7 13.91,58.42 12.06,56.58 9.65,56.58 v8.95,55.88
C_D8  (via drill 0.3)
  Top 0.127: v21.78,66.86 21.78,57.85 22.29,57.34 24.19,57.34 27.56,53.98 27.56,53.53 | 27.56,53.53 27.56,49.85 28.57,48.83 28.57,48.58 29.84,47.31 35.88,47.31 CR1.7 | v29.27,55.88 29.27,54.61 28.19,53.53 27.56,53.53
  Bottom 0.127: v21.78,66.86 22.54,67.63 IC6.14 | CL1.7 34.23,58.42 32.38,56.58 29.97,56.58 v29.27,55.88
C_D9  (via drill 0.3)
  Top 0.127: v30.29,59.31 30.29,59.44 29.97,59.75 28.32,59.75 27.18,60.9 26.42,60.9 v25.78,60.26 25.84,60.26 25.84,60.01 27.05,58.8 v27.05,58.04 | v29.27,50.74 CR1.8
  Bottom 0.127: v25.78,60.26 23.43,60.26 22.73,60.96 22.73,66.67 23.05,66.99 23.05,67.5 IC6.13 | v30.29,59.31 30.54,59.31 31.43,58.42 CL1.8 | v29.27,50.74 29.27,51.44 27.05,53.66 v27.05,58.04
C_D10  (via drill 0.3)
  Top 0.127: v23.43,64.58 23.88,64.58 28.26,60.2 v28.51,60.2 | 36.2,51.63 36.2,51.44 CR1.9 | v35.31,54.99 35.31,54.74 34.73,54.17 34.73,51.88 34.99,51.63 36.2,51.63 | 36.2,51.63 v36.2,51.69
  Bottom 0.127: v23.43,64.58 23.3,64.71 23.3,66.1 23.62,66.42 23.62,66.93 IC6.12 | v28.51,60.2 28.51,58.36 28.83,58.04 28.83,55.69 30.48,54.04 33.66,54.04 35.18,52.51 35.37,52.51 v36.2,51.69 | CL1.9 36.2,55.88 v35.31,54.99
C_D11  (via drill 0.3)
  Top 0.127: v23.88,65.02 25.78,63.12 25.78,63.06 26.04,62.8 32.38,62.8 v35.88,59.31 | CR1.10 33.59,52.64 v33.59,54.74
  Bottom 0.127: v23.88,65.02 23.88,65.53 24.19,65.85 24.19,66.36 IC6.11 | v35.88,59.31 38.42,59.31 38.67,59.05 38.67,55.24 37.97,54.55 33.59,54.55 | 33.59,54.55 33.08,54.55 CL1.10 | 33.59,54.55 v33.59,54.74
C_D12  (via drill 0.3)
  Top 0.127: v23.62,60.71 23.62,59.05 27.3,55.37 28.13,55.37 29.08,56.33 29.46,56.33 29.72,56.07 v29.72,55.44 | v36.83,52.45 CR1.11
  Bottom 0.127: v23.62,60.71 23.62,64.14 24.77,65.28 24.77,65.79 IC6.10 | v29.72,55.44 30.86,54.29 35.88,54.29 CR1.11 v36.83,52.45
C_D13  (via drill 0.3)
  Top 0.127: v26.67,60.45 26.67,59.56 v28.19,58.04 | v31.75,52.45 CR1.12
  Bottom 0.127: v26.67,60.45 26.67,63.44 25.4,64.71 25.4,65.22 IC6.9 | v28.19,58.04 28.19,56.13 28.57,55.75 28.57,55.56 30.8,53.34 CR1.12 v31.75,52.45
C_D14  (via drill 0.3)
  Top 0.127: CR1.13 34.99,54.04 34.99,52.26 v35.18,52.07
  Bottom 0.127: 35.18,51.75 35.5,51.75 36.45,50.8 CL1.13 | 35.18,51.75 30.86,51.75 28.32,54.29 28.32,55.63 27.75,56.2 27.75,58.23 28.07,58.55 28.07,60.39 28.96,61.28 28.96,63.94 27.94,64.96 27.94,65.22 IC6.8 | 35.18,51.75 v35.18,52.07
C_D15  (via drill 0.3)
  Top 0.127: v30.61,57.02 CR1.14 31.69,55.88 29.91,54.1 v29.91,51.69
  Bottom 0.127: v30.61,57.02 29.27,58.36 29.27,64.58 28.51,65.34 28.51,65.79 IC6.7 | CL1.14 30.8,50.8 v29.91,51.69
C_D16  (via drill 0.3)
  Top 0.127: v42.1,66.86 42.1,57.85 42.61,57.34 44.51,57.34 47.88,53.98 47.88,53.53 | 47.88,53.53 47.88,49.85 48.9,48.83 48.9,48.58 50.16,47.31 56.2,47.31 CR2.7 | v49.59,55.88 49.59,54.61 48.51,53.53 47.88,53.53
  Bottom 0.127: v42.1,66.86 42.86,67.63 IC7.14 | CL2.7 54.55,58.42 52.7,56.58 50.29,56.58 v49.59,55.88
C_D17  (via drill 0.3)
  Top 0.127: v50.61,59.31 50.61,59.44 50.29,59.75 48.64,59.75 47.5,60.9 46.74,60.9 v46.1,60.26 46.16,60.26 46.16,60.01 47.37,58.8 v47.37,58.04 | v49.59,50.74 CR2.8
  Bottom 0.127: v46.1,60.26 43.75,60.26 43.05,60.96 43.05,66.67 43.37,66.99 43.37,67.5 IC7.13 | v50.61,59.31 50.86,59.31 51.75,58.42 CL2.8 | v49.59,50.74 49.59,51.44 47.37,53.66 v47.37,58.04
C_D18  (via drill 0.3)
  Top 0.127: v43.75,64.58 44.2,64.58 48.58,60.2 v48.83,60.2 | 56.52,51.63 56.52,51.44 CR2.9 | v55.63,54.99 55.63,54.74 55.05,54.17 55.05,51.88 55.31,51.63 56.52,51.63 | 56.52,51.63 v56.52,51.69
  Bottom 0.127: v43.75,64.58 43.62,64.71 43.62,66.1 43.94,66.42 43.94,66.93 IC7.12 | v48.83,60.2 48.83,58.36 49.15,58.04 49.15,55.69 50.8,54.04 53.98,54.04 55.5,52.51 55.69,52.51 v56.52,51.69 | CL2.9 56.52,55.88 v55.63,54.99
C_D19  (via drill 0.3)
  Top 0.127: v44.2,65.02 46.1,63.12 46.1,63.06 46.35,62.8 52.7,62.8 v56.2,59.31 | CR2.10 53.91,52.64 v53.91,54.74
  Bottom 0.127: v44.2,65.02 44.2,65.53 44.51,65.85 44.51,66.36 IC7.11 | v56.2,59.31 58.74,59.31 58.99,59.05 58.99,55.24 58.29,54.55 53.91,54.55 | 53.91,54.55 53.4,54.55 CL2.10 | 53.91,54.55 v53.91,54.74
C_D20  (via drill 0.3)
  Top 0.127: v43.94,60.71 43.94,59.05 47.62,55.37 48.45,55.37 49.4,56.33 49.78,56.33 50.04,56.07 v50.04,55.44 | v57.15,52.45 CR2.11
  Bottom 0.127: v43.94,60.71 43.94,64.14 45.09,65.28 45.09,65.79 IC7.10 | v50.04,55.44 51.18,54.29 56.2,54.29 CR2.11 v57.15,52.45
C_D21  (via drill 0.3)
  Top 0.127: v46.99,60.45 46.99,59.56 v48.51,58.04 | v52.07,52.45 CR2.12
  Bottom 0.127: v46.99,60.45 46.99,63.44 45.72,64.71 45.72,65.22 IC7.9 | v48.51,58.04 48.51,56.13 48.9,55.75 48.9,55.56 51.12,53.34 CR2.12 v52.07,52.45
C_D22  (via drill 0.3)
  Top 0.127: CR2.13 55.31,54.04 55.31,52.26 v55.5,52.07
  Bottom 0.127: 55.5,51.75 55.82,51.75 56.77,50.8 CL2.13 | 55.5,51.75 51.18,51.75 48.64,54.29 48.64,55.63 48.07,56.2 48.07,58.23 48.39,58.55 48.39,60.39 49.28,61.28 49.28,63.94 48.26,64.96 48.26,65.22 IC7.8 | 55.5,51.75 v55.5,52.07
C_D23  (via drill 0.3)
  Top 0.127: v50.93,57.02 CR2.14 52.01,55.88 50.23,54.1 v50.23,51.69
  Bottom 0.127: v50.93,57.02 49.59,58.36 49.59,64.58 48.83,65.34 48.83,65.79 IC7.7 | CL2.14 51.12,50.8 v50.23,51.69
CL_OE  (via drill 0.3)
  Top 0.127: v6.73,72.77 6.73,72.33 4.57,70.17 4.57,67.5 2.16,65.09 v2.16,58.17 | v4.57,54.48 v2.16,56.9
  Bottom 0.127: v6.73,72.77 7.81,73.85 7.81,74.3 8.13,74.61 8.13,75.12 IC8.26 | v2.16,56.9 v2.16,58.17 | v4.57,54.48 4.57,54.1 4.32,53.85 4.32,49.97 11.11,43.18 CL.20
CL_OE1  (via drill 0.3)
  Top 0.127: v27.05,72.77 27.05,72.33 24.89,70.17 24.89,67.5 22.48,65.09 v22.48,58.17 | v24.89,54.48 v22.48,56.9
  Bottom 0.127: v27.05,72.77 28.13,73.85 28.13,74.3 28.45,74.61 28.45,75.12 IC6.26 | v22.48,56.9 v22.48,58.17 | v24.89,54.48 24.89,54.1 24.64,53.85 24.64,49.97 31.43,43.18 CL1.20
CL_OE2  (via drill 0.3)
  Top 0.127: v47.37,72.77 47.37,72.33 45.21,70.17 45.21,67.5 42.8,65.09 v42.8,58.17 | v45.21,54.48 v42.8,56.9
  Bottom 0.127: v47.37,72.77 48.45,73.85 48.45,74.3 48.77,74.61 48.77,75.12 IC7.26 | v42.8,56.9 v42.8,58.17 | v45.21,54.48 45.21,54.1 44.96,53.85 44.96,49.97 51.75,43.18 CL2.20
CL_PWDN
  Bottom 0.127: CL.16 J_CS1.2
CL_PWDN1
  Bottom 0.127: CL1.16 J_CS4.2
CL_PWDN2
  Bottom 0.127: CL2.16 J_CS7.2
CL_RCK  (via drill 0.3)
  Top 0.127: v4.32,73.41 3.87,73.41 1.02,70.55 1.02,57.4 v4.76,53.66
  Bottom 0.127: v4.32,73.41 4.32,73.72 3.94,74.11 3.94,74.55 IC8.22 | v4.76,53.66 4.76,49.91 8.95,45.72 CL.18
CL_RCK1  (via drill 0.3)
  Top 0.127: v24.64,73.41 24.19,73.41 21.34,70.55 21.34,57.4 v25.08,53.66
  Bottom 0.127: v24.64,73.41 24.64,73.72 24.26,74.11 24.26,74.55 IC6.22 | v25.08,53.66 25.08,49.91 29.27,45.72 CL1.18
CL_RCK2  (via drill 0.3)
  Top 0.127: v44.96,73.41 44.51,73.41 41.66,70.55 41.66,57.4 v45.4,53.66
  Bottom 0.127: v44.96,73.41 44.96,73.72 44.58,74.11 44.58,74.55 IC7.22 | v45.4,53.66 45.4,49.91 49.59,45.72 CL2.18
CL_RST  (via drill 0.3)
  Top 0.127: 6.45,56.99 6.41,56.96 6.03,56.96 v3.75,59.24 | 6.45,56.99 7.05,57.59 8.89,57.59 J_CS2.3 8.89,57.66 13.14,57.66 13.65,58.17 v13.65,59.69 | CR.22 12.76,66.04 v13.72,65.09 | v15.62,49.15 14.86,49.15 13.27,47.56 9.65,47.56 8.51,48.7 v8.51,52.51 | v7.18,55.82 7.18,56.26 6.45,56.99
  Bottom 0.127: CL.22 14.03,40.64 14.73,39.94 18.29,39.94 18.35,40.01 18.35,46.42 CL.15 v15.62,49.15 | v3.75,59.24 1.02,61.98 1.02,68.01 IC8.15 1.71,68.71 2.03,69.03 2.03,69.66 1.14,70.55 1.14,71.75 IC8.17 | v13.72,65.09 13.72,64.83 14.03,64.52 14.03,60.07 v13.65,59.69 | v8.51,52.51 7.18,53.85 v7.18,55.82
CL_RST1  (via drill 0.3)
  Top 0.127: 26.77,56.99 26.73,56.96 26.35,56.96 v24.07,59.24 | 26.77,56.99 27.37,57.59 29.21,57.59 J_CS5.3 29.21,57.66 33.47,57.66 33.97,58.17 v33.97,59.69 | CR1.22 33.08,66.04 v34.04,65.09 | v35.94,49.15 35.18,49.15 33.59,47.56 29.97,47.56 28.83,48.7 v28.83,52.51 | v27.5,55.82 27.5,56.26 26.77,56.99
  Bottom 0.127: CL1.22 34.35,40.64 35.05,39.94 38.61,39.94 38.67,40.01 38.67,46.42 CL1.15 v35.94,49.15 | v24.07,59.24 21.34,61.98 21.34,68.01 IC6.15 22.04,68.71 22.35,69.03 22.35,69.66 21.46,70.55 21.46,71.75 IC6.17 | v34.04,65.09 34.04,64.83 34.35,64.52 34.35,60.07 v33.97,59.69 | v28.83,52.51 27.5,53.85 v27.5,55.82
CL_RST2  (via drill 0.3)
  Top 0.127: 47.09,56.99 47.05,56.96 46.67,56.96 v44.39,59.24 | 47.09,56.99 47.69,57.59 49.53,57.59 J_CS8.3 49.53,57.66 53.78,57.66 54.29,58.17 v54.29,59.69 | CR2.22 53.4,66.04 v54.36,65.09 | v56.26,49.15 55.5,49.15 53.91,47.56 50.29,47.56 49.15,48.7 v49.15,52.51 | v47.82,55.82 47.82,56.26 47.09,56.99
  Bottom 0.127: CL2.22 54.67,40.64 55.37,39.94 58.93,39.94 58.99,40.01 58.99,46.42 CL2.15 v56.26,49.15 | v44.39,59.24 41.66,61.98 41.66,68.01 IC7.15 42.35,68.71 42.67,69.03 42.67,69.66 41.78,70.55 41.78,71.75 IC7.17 | v54.36,65.09 54.36,64.83 54.67,64.52 54.67,60.07 v54.29,59.69 | v49.15,52.51 47.82,53.85 v47.82,55.82
CL_VSYNC  (via drill 0.3)
  Top 0.127: v7.94,72.96 7.94,73.47 v7.37,74.04 | v10.22,64.64 v7.81,67.06
  Bottom 0.127: v7.94,72.96 8.95,73.98 9.27,73.98 IC8.28 | v7.37,74.04 6.29,72.96 6.29,70.48 7.81,68.96 v7.81,67.06 | v10.22,64.64 12.76,64.64 13.27,64.14 13.27,62.87 12.06,61.66 9.65,61.66 9.59,61.59 9.59,60.33 10.67,59.24 14.8,59.24 CL.5
CL_VSYNC1  (via drill 0.3)
  Top 0.127: v28.26,72.96 28.26,73.47 v27.69,74.04 | v30.54,64.64 v28.13,67.06
  Bottom 0.127: v28.26,72.96 29.27,73.98 29.59,73.98 IC6.28 | v27.69,74.04 26.61,72.96 26.61,70.48 28.13,68.96 v28.13,67.06 | v30.54,64.64 33.08,64.64 33.59,64.14 33.59,62.87 32.38,61.66 29.97,61.66 29.91,61.59 29.91,60.33 30.99,59.24 35.12,59.24 CL1.5
CL_VSYNC2  (via drill 0.3)
  Top 0.127: v48.58,72.96 48.58,73.47 v48.01,74.04 | v50.86,64.64 v48.45,67.06
  Bottom 0.127: v48.58,72.96 49.59,73.98 49.91,73.98 IC7.28 | v48.01,74.04 46.93,72.96 46.93,70.48 48.45,68.96 v48.45,67.06 | v50.86,64.64 53.4,64.64 53.91,64.14 53.91,62.87 52.7,61.66 50.29,61.66 50.23,61.59 50.23,60.33 51.31,59.24 55.44,59.24 CL2.5
CL_WR  (via drill 0.3)
  Top 0.127: v3.17,72.07 3.17,66.48 1.71,65.02 1.71,57.98 2.1,57.59 4.06,57.59 v7.68,53.98
  Bottom 0.127: v3.17,72.07 3.17,72.58 2.79,72.96 2.79,73.41 IC8.20 | v7.68,53.98 7.94,53.98 10.41,51.5 13.21,51.5 14.67,50.04 14.67,45.02 CL.19
CL_WR1  (via drill 0.3)
  Top 0.127: v23.5,72.07 23.5,66.48 22.04,65.02 22.04,57.98 22.42,57.59 24.38,57.59 v28,53.98
  Bottom 0.127: v23.5,72.07 23.5,72.58 23.11,72.96 23.11,73.41 IC6.20 | v28,53.98 28.26,53.98 30.73,51.5 33.53,51.5 34.99,50.04 34.99,45.02 CL1.19
CL_WR2  (via drill 0.3)
  Top 0.127: v43.81,72.07 43.81,66.48 42.35,65.02 42.35,57.98 42.74,57.59 44.7,57.59 v48.32,53.98
  Bottom 0.127: v43.81,72.07 43.81,72.58 43.43,72.96 43.43,73.41 IC7.20 | v48.32,53.98 48.58,53.98 51.05,51.5 53.85,51.5 55.31,50.04 55.31,45.02 CL2.19
CL_WRST  (via drill 0.3)
  Top 0.127: v15.68,61.85 18.1,61.85 18.35,61.59 18.35,57.78 18.1,57.53 14.99,57.53 14.16,56.71 v14.16,49.85
  Bottom 0.127: v15.68,61.85 14.41,63.12 14.41,66.29 12.89,67.82 12.51,67.82 12.38,67.69 11.3,67.69 10.92,68.07 10.48,68.07 IC8.3 | v14.16,49.85 14.16,48.96 14.41,48.7 14.41,42.74 CL.21
CL_WRST1  (via drill 0.3)
  Top 0.127: v36.01,61.85 38.42,61.85 38.67,61.59 38.67,57.78 38.42,57.53 35.31,57.53 34.48,56.71 v34.48,49.85
  Bottom 0.127: v36.01,61.85 34.73,63.12 34.73,66.29 33.21,67.82 32.83,67.82 32.7,67.69 31.62,67.69 31.24,68.07 30.8,68.07 IC6.3 | v34.48,49.85 34.48,48.96 34.73,48.7 34.73,42.74 CL1.21
CL_WRST2  (via drill 0.3)
  Top 0.127: v56.33,61.85 58.74,61.85 58.99,61.59 58.99,57.78 58.74,57.53 55.63,57.53 54.8,56.71 v54.8,49.85
  Bottom 0.127: v56.33,61.85 55.05,63.12 55.05,66.29 53.53,67.82 53.15,67.82 53.02,67.69 51.94,67.69 51.56,68.07 51.12,68.07 IC7.3 | v54.8,49.85 54.8,48.96 55.05,48.7 55.05,42.74 CL2.21
CR_OE  (via drill 0.3)
  Top 0.127: v16.57,67.25 17.78,67.25 18.35,66.67 18.35,62.87 18.29,62.8 12.45,62.8 11.75,63.5 CR.20
  Bottom 0.127: v16.57,67.25 13.14,70.67 10.92,70.67 10.6,70.36 8.83,70.36 7.49,71.69 7.49,73.15 8.7,74.36 8.7,74.55 IC8.27
CR_OE1  (via drill 0.3)
  Top 0.127: v36.89,67.25 38.1,67.25 38.67,66.67 38.67,62.87 38.61,62.8 32.77,62.8 32.07,63.5 CR1.20
  Bottom 0.127: v36.89,67.25 33.47,70.67 31.24,70.67 30.92,70.36 29.15,70.36 27.81,71.69 27.81,73.15 29.02,74.36 29.02,74.55 IC6.27
CR_OE2  (via drill 0.3)
  Top 0.127: v57.21,67.25 58.42,67.25 58.99,66.67 58.99,62.87 58.93,62.8 53.09,62.8 52.39,63.5 CR2.20
  Bottom 0.127: v57.21,67.25 53.78,70.67 51.56,70.67 51.24,70.36 49.47,70.36 48.13,71.69 48.13,73.15 49.34,74.36 49.34,74.55 IC7.27
CR_PWDN
  Top 0.127: CR.16 J_CS2.2
CR_PWDN1
  Top 0.127: CR1.16 J_CS5.2
CR_PWDN2
  Top 0.127: CR2.16 J_CS8.2
CR_RCK  (via drill 0.3)
  Top 0.127: v6.48,69.66 v5.59,70.55 | v7.3,62.36 10.03,62.36 CR.18
  Bottom 0.127: v5.59,70.55 5.59,73.6 4.51,74.68 4.51,75.12 IC8.23 | v6.48,69.66 6.48,68.96 7.24,68.2 7.24,66.23 6.67,65.66 6.67,62.99 v7.3,62.36
CR_RCK1  (via drill 0.3)
  Top 0.127: v26.8,69.66 v25.91,70.55 | v27.62,62.36 30.35,62.36 CR1.18
  Bottom 0.127: v25.91,70.55 25.91,73.6 24.83,74.68 24.83,75.12 IC6.23 | v26.8,69.66 26.8,68.96 27.56,68.2 27.56,66.23 26.99,65.66 26.99,62.99 v27.62,62.36
CR_RCK2  (via drill 0.3)
  Top 0.127: v47.12,69.66 v46.23,70.55 | v47.94,62.36 50.67,62.36 CR2.18
  Bottom 0.127: v46.23,70.55 46.23,73.6 45.15,74.68 45.15,75.12 IC7.23 | v47.12,69.66 47.12,68.96 47.88,68.2 47.88,66.23 47.31,65.66 47.31,62.99 v47.94,62.36
CR_RST  (via drill 0.3)
  Top 0.127: v13.59,50.48 13.59,54.42 13.91,54.74 13.91,56.83 15.49,58.42 CR.15 | v5.84,50.35 v1.71,54.48
  Bottom 0.127: 8.89,49.09 12.19,49.09 v13.59,50.48 | v1.71,54.48 0.76,55.44 0.76,68.39 1.08,68.71 1.08,69.15 IC8.16 | v5.84,50.35 7.62,50.35 8.89,49.09 | 8.89,49.09 J_CS1.3
CR_RST1  (via drill 0.3)
  Top 0.127: v33.91,50.48 33.91,54.42 34.23,54.74 34.23,56.83 35.81,58.42 CR1.15 | v26.16,50.35 v22.04,54.48
  Bottom 0.127: 29.21,49.09 32.51,49.09 v33.91,50.48 | v22.04,54.48 21.08,55.44 21.08,68.39 21.4,68.71 21.4,69.15 IC6.16 | v26.16,50.35 27.94,50.35 29.21,49.09 | 29.21,49.09 J_CS4.3
CR_RST2  (via drill 0.3)
  Top 0.127: v54.23,50.48 54.23,54.42 54.55,54.74 54.55,56.83 56.13,58.42 CR2.15 | v46.48,50.35 v42.35,54.48
  Bottom 0.127: 49.53,49.09 52.83,49.09 v54.23,50.48 | v42.35,54.48 41.4,55.44 41.4,68.39 41.72,68.71 41.72,69.15 IC7.16 | v46.48,50.35 48.26,50.35 49.53,49.09 | 49.53,49.09 J_CS7.3
CR_VSYNC  (via drill 0.3)
  Top 0.127: v0.51,73.41 0.51,54.36 4.51,50.35 v5.21,50.35 | v7.81,48.64 10.03,46.42 15.81,46.42 CR.5
  Bottom 0.127: v0.51,73.41 3.75,76.64 8.06,76.64 10.22,74.49 10.22,74.3 9.91,73.98 9.91,73.47 IC8.29 | v5.21,50.35 5.65,49.91 6.54,49.91 v7.81,48.64
CR_VSYNC1  (via drill 0.3)
  Top 0.127: v20.83,73.41 20.83,54.36 24.83,50.35 v25.53,50.35 | v28.13,48.64 30.35,46.42 36.13,46.42 CR1.5
  Bottom 0.127: v20.83,73.41 24.07,76.64 28.38,76.64 30.54,74.49 30.54,74.3 30.23,73.98 30.23,73.47 IC6.29 | v25.53,50.35 25.97,49.91 26.86,49.91 v28.13,48.64
CR_VSYNC2  (via drill 0.3)
  Top 0.127: v41.15,73.41 41.15,54.36 45.15,50.35 v45.85,50.35 | v48.45,48.64 50.67,46.42 56.45,46.42 CR2.5
  Bottom 0.127: v41.15,73.41 44.39,76.64 48.7,76.64 50.86,74.49 50.86,74.3 50.55,73.98 50.55,73.47 IC7.29 | v45.85,50.35 46.29,49.91 47.18,49.91 v48.45,48.64
CR_WR  (via drill 0.3)
  Top 0.127: v6.54,66.99 6.54,64.9 7.75,63.69 7.75,63.56 8,63.31 8.76,63.31 9.65,64.2 14.35,64.2 15.05,63.5 CR.19
  Bottom 0.127: v6.54,66.99 1.71,71.82 1.71,72.26 IC8.18
CR_WR1  (via drill 0.3)
  Top 0.127: v26.86,66.99 26.86,64.9 28.07,63.69 28.07,63.56 28.32,63.31 29.08,63.31 29.97,64.2 34.67,64.2 35.37,63.5 CR1.19
  Bottom 0.127: v26.86,66.99 22.04,71.82 22.04,72.26 IC6.18
CR_WR2  (via drill 0.3)
  Top 0.127: v47.18,66.99 47.18,64.9 48.39,63.69 48.39,63.56 48.64,63.31 49.4,63.31 50.29,64.2 54.99,64.2 55.69,63.5 CR2.19
  Bottom 0.127: v47.18,66.99 42.35,71.82 42.35,72.26 IC7.18
CR_WRST  (via drill 0.3)
  Top 0.127: v15.18,65.15 15.3,65.15 16.19,66.04 CR.21
  Bottom 0.127: v15.18,65.15 14.92,65.15 14.67,65.41 14.67,66.42 13.02,68.07 12.06,68.07 11.49,68.64 11.05,68.64 IC8.2
CR_WRST1  (via drill 0.3)
  Top 0.127: v35.5,65.15 35.62,65.15 36.51,66.04 CR1.21
  Bottom 0.127: v35.5,65.15 35.24,65.15 34.99,65.41 34.99,66.42 33.34,68.07 32.38,68.07 31.81,68.64 31.37,68.64 IC6.2
CR_WRST2  (via drill 0.3)
  Top 0.127: v55.82,65.15 55.94,65.15 56.83,66.04 CR2.21
  Bottom 0.127: v55.82,65.15 55.56,65.15 55.31,65.41 55.31,66.42 53.66,68.07 52.7,68.07 52.13,68.64 51.69,68.64 IC7.2
CS0
  Top 0.127: 76.14,16.45 76.07,16.45 74.42,18.1 71.63,18.1 70.87,18.86 U$3.A5 | 76.14,16.45 76.83,16.45 U$1.CSN | SV1.7 73.66,11.3 75.25,12.89 75.25,15.56 76.14,16.45
  Bottom 0.127: IC4.6 71.12,25.78 69.34,24 69.34,20.38 70.8,18.92 U$3.A5
CS1
  Top 0.127: 76.14,53.28 76.07,53.28 74.42,54.93 71.63,54.93 70.87,55.69 U$4.A5 | 76.14,53.28 76.83,53.28 U$2.CSN | SV2.7 73.66,48.13 75.25,49.72 75.25,52.39 76.14,53.28
  Bottom 0.127: IC5.6 71.12,62.61 69.34,60.83 69.34,57.21 70.8,55.75 U$4.A5
DW
  Bottom 0.127: IC4.4 68.58,28.45 69.47,29.34 72.77,29.34 73.85,28.26 73.85,14.29 72.07,12.51 72.07,12.26 70.93,11.11 70.67,11.11 69.85,10.29 69.85,6.99 70.87,5.97 R24.2 70.87,5.71 72.77,3.81 D2.A DW.1
DW1
  Bottom 0.127: IC5.4 68.58,65.28 69.47,66.17 72.77,66.17 73.85,65.09 73.85,51.12 72.07,49.34 72.07,49.09 70.93,47.94 70.67,47.94 69.85,47.12 69.85,43.81 70.87,42.8 R29.2 70.87,42.55 72.77,40.64 D1.A DW1.1
FON  (via drill 0.3)
  Top 0.508: v14.1,86.04 14.73,86.68 18.54,86.68 20.13,85.09 SV9.3
  Bottom 0.508: SV9.3 20.77,85.41 20.77,89.85 21.72,90.81 21.72,93.03 20.45,94.3 SV11.3 | SV8.3 6.16,83.82 14.1,83.82 v14.1,86.04
GND  (via drill 0.3, 0.35)
  Top 0.635: 13.26,35.52 12.07,35.52 I2C10.8 | 13.26,35.52 14.59,35.52 I2C10.10 | 13.26,35.52 13.26,32.51 12.07,31.32 12.07,26.71 I2C6.6 | GND.1 1.18,5.83 1.87,5.13 R.13 2.22,5.06 v5.92,1.36 | v12.42,14.63 12.42,12.61 13.05,11.98 IC1.5 13.26,11.7 14.31,10.65 14.31,8.62 13.12,7.44 v11.3,7.44
  Bottom 0.635: C1.2 13.96,15.61 12.42,15.61 11.86,16.17 C5.- | v12.42,14.63 12.42,15.33 C5.- | v11.3,7.44 12.07,6.67 12.07,5.13 SPI.6 11.86,4.85 10.88,3.87 10.88,2.2 10.05,1.36 v5.92,1.36 | I2C6.6 12.07,26.64 12.07,25.81 13.26,24.62 13.26,22.04 11.93,20.71 11.93,16.52 C5.-
  other vias: 7.62,13.97 6.35,15.24 3.68,15.49 4.45,3.17 4.45,1.27 17.78,1.27 16.51,1.27 5.84,28.45 6.99,29.84 6.35,30.48 1.91,19.05 1.91,16.51 1.91,24.13 1.91,26.67 10.16,11.43 13.08,3.3
  pour Top: 19.05,38.1 0,38.1 0,0 19.05,0
  pour Bottom: 19.05,38.1 0,38.1 0,0 19.05,0
GND1  (via drill 0.3, 0.35)
  Top 0.635: 33.58,35.52 32.39,35.52 I2C1.8 | 33.58,35.52 34.91,35.52 I2C1.10 | 33.58,35.52 33.58,32.51 32.39,31.32 32.39,26.71 I2C2.6 | GND1.1 21.5,5.83 22.19,5.13 R1.13 22.54,5.06 v26.25,1.36 | v32.74,14.63 32.74,12.61 33.37,11.98 IC2.5 33.58,11.7 34.63,10.65 34.63,8.62 33.44,7.44 v31.62,7.44
  Bottom 0.635: C2.2 34.28,15.61 32.74,15.61 32.18,16.17 C3.- | v32.74,14.63 32.74,15.33 C3.- | v31.62,7.44 32.39,6.67 32.39,5.13 SPI1.6 32.18,4.85 31.2,3.87 31.2,2.2 30.37,1.36 v26.25,1.36 | I2C2.6 32.39,26.64 32.39,25.81 33.58,24.62 33.58,22.04 32.25,20.71 32.25,16.52 C3.-
  other vias: 27.94,13.97 26.67,15.24 24,15.49 24.77,3.17 24.77,1.27 38.1,1.27 36.83,1.27 26.16,28.45 27.3,29.84 26.67,30.48 22.23,19.05 22.23,16.51 22.23,24.13 22.23,26.67 30.48,11.43 33.4,3.3
  pour Top: 39.37,38.1 20.32,38.1 20.32,0 39.37,0
  pour Bottom: 39.37,38.1 20.32,38.1 20.32,0 39.37,0
GND2  (via drill 0.3, 0.35)
  Top 0.635: 53.9,35.52 52.71,35.52 I2C3.8 | 53.9,35.52 55.23,35.52 I2C3.10 | 53.9,35.52 53.9,32.51 52.71,31.32 52.71,26.71 I2C4.6 | GND2.1 41.81,5.83 42.51,5.13 R16.13 42.86,5.06 v46.56,1.36 | v53.06,14.63 53.06,12.61 53.69,11.98 IC3.5 53.9,11.7 54.95,10.65 54.95,8.62 53.76,7.44 v51.94,7.44
  Bottom 0.635: C4.2 54.6,15.61 53.06,15.61 52.5,16.17 C6.- | v53.06,14.63 53.06,15.33 C6.- | v51.94,7.44 52.71,6.67 52.71,5.13 SPI2.6 52.5,4.85 51.52,3.87 51.52,2.2 50.69,1.36 v46.56,1.36 | I2C4.6 52.71,26.64 52.71,25.81 53.9,24.62 53.9,22.04 52.57,20.71 52.57,16.52 C6.-
  other vias: 48.26,13.97 46.99,15.24 44.32,15.49 45.09,3.17 45.09,1.27 58.42,1.27 57.15,1.27 46.48,28.45 47.62,29.84 46.99,30.48 42.55,19.05 42.55,16.51 42.55,24.13 42.55,26.67 50.8,11.43 53.72,3.3
  pour Top: 59.69,38.1 40.64,38.1 40.64,0 59.69,0
  pour Bottom: 59.69,38.1 40.64,38.1 40.64,0 59.69,0
GND3  (via drill 0.35, 0.76)
  Top 0.762: X1.6 69.53,6.35 70.23,5.65 72.96,5.65 GND_.1 73.47,6.67 73.47,7.11 73.28,7.3 73.28,8.32 73.85,8.89 74.93,8.89 SV1.9 | v75.25,33.72 74.87,33.34 74.87,31.94 U$3.B7 | C9.- 62.99,14.54 64.83,16.38 U$1.GND0
  Bottom 0.762: U$3.A8 76.9,18.86 76.9,18.03 78.04,16.89 78.04,14.54 SV1.10 SV1.9 | C7.2 63.37,24.19 IC4.14 64.58,22.48 64.58,21.14 63.06,19.62 63.06,19.24 U$3.A1 | U$3.A1 62.8,18.86 61.66,17.72 61.66,15.88 62.99,14.54 C8.- 63.12,12.95 64.45,11.62 64.45,9.91 65.47,8.89 65.72,8.89 68.26,6.35 X1.6 | v75.25,33.72 74.04,33.72 73.41,34.35 U$1.GND1 | U$3.A1 62.87,18.41 64.83,16.45 U$1.GND0
  other vias: 76.2,26.67 76.2,27.94 72.39,20.32 63.5,5.08 62.23,22.86
  pour Top: 78.74,2.54 78.74,38.1 60.96,38.1 60.96,2.54
  pour Bottom: 78.74,2.54 78.74,38.1 60.96,38.1 60.96,2.54
GND4  (via drill 0.35, 0.76)
  Top 0.762: X2.6 69.53,43.18 70.23,42.48 72.96,42.48 GND_1.1 73.47,43.5 73.47,43.94 73.28,44.13 73.28,45.15 73.85,45.72 74.93,45.72 SV2.9 | v75.25,70.55 74.87,70.17 74.87,68.77 U$4.B7 | C12.- 62.99,51.37 64.83,53.21 U$2.GND0
  Bottom 0.762: U$4.A8 76.9,55.69 76.9,54.86 78.04,53.72 78.04,51.37 SV2.10 SV2.9 | C10.2 63.37,61.02 IC5.14 64.58,59.31 64.58,57.98 63.06,56.45 63.06,56.07 U$4.A1 | U$4.A1 62.8,55.69 61.66,54.55 61.66,52.7 62.99,51.37 C11.- 63.12,49.78 64.45,48.45 64.45,46.74 65.47,45.72 65.72,45.72 68.26,43.18 X2.6 | v75.25,70.55 74.04,70.55 73.41,71.18 U$2.GND1 | U$4.A1 62.87,55.24 64.83,53.28 U$2.GND0
  other vias: 76.2,63.5 76.2,64.77 72.39,57.15 63.5,41.91 62.23,59.69
  pour Top: 78.74,39.37 78.74,74.93 60.96,74.93 60.96,39.37
  pour Bottom: 78.74,39.37 78.74,74.93 60.96,74.93 60.96,39.37
GND5  (via drill 0.35, 0.38)
  Top 0.381: C15.2 4.45,41.15 4.7,40.89 C13.- 4.32,41.02 2.29,41.02 SV3.5 | v10.48,41.59 CR.2 | C14.2 15.88,72.39 14.03,74.23 13.4,74.23 | 13.4,74.23 13.02,74.23 v12.51,74.74 | v12.7,67.31 BUS.6 12.83,70.1 v12.83,72.33 | v13.4,73.53 13.4,74.23 | v13.72,48.7 13.84,48.7 15.11,49.97 18.35,49.97 18.48,50.1 18.48,56.58 18.03,57.02 v15.18,57.02 | v14.29,57.91 14.29,59.88 v13.53,60.64
  Bottom 0.381: SV3.5 6.03,40.64 6.99,41.59 v10.48,41.59 10.6,41.72 12.64,41.72 13.72,42.8 v13.72,48.7 | PAD14.1 v12.51,74.74 | CL.2 10.48,66.04 9.59,66.93 9.34,66.93 IC8.5 | v12.7,67.31 CL.2 | v13.4,73.53 13.4,72.9 v12.83,72.33 | v14.29,57.91 v15.18,57.02 | v13.53,60.64 13.53,62.55 13.65,62.67 13.65,64.33 11.81,66.17 CL.2
  other vias: 8.26,43.81 8.26,43.18 13.34,44.45 11.43,44.45 1.27,75.56 1.27,76.2 13.34,62.23 10.16,76.2 10.16,76.83 15.24,74.04
  pour Bottom: 0,39.37 19.05,39.37 19.05,77.47 0,77.47
  pour Top: 0,39.37 19.05,39.37 19.05,77.47 0,77.47
GND6  (via drill 0.35, 0.38)
  Top 0.381: C16.2 24.77,41.15 25.02,40.89 C17.- 24.64,41.02 22.61,41.02 SV4.5 | v30.8,41.59 CR1.2 | C18.2 36.2,72.39 34.35,74.23 33.72,74.23 | 33.72,74.23 33.34,74.23 v32.83,74.74 | v33.02,67.31 BUS1.6 33.15,70.1 v33.15,72.33 | v33.72,73.53 33.72,74.23 | v34.04,48.7 34.16,48.7 35.43,49.97 38.67,49.97 38.8,50.1 38.8,56.58 38.35,57.02 v35.5,57.02 | v34.61,57.91 34.61,59.88 v33.85,60.64
  Bottom 0.381: SV4.5 26.35,40.64 27.3,41.59 v30.8,41.59 30.92,41.72 32.96,41.72 34.04,42.8 v34.04,48.7 | PAD20.1 v32.83,74.74 | CL1.2 30.8,66.04 29.91,66.93 29.65,66.93 IC6.5 | v33.02,67.31 CL1.2 | v33.72,73.53 33.72,72.9 v33.15,72.33 | v34.61,57.91 v35.5,57.02 | v33.85,60.64 33.85,62.55 33.97,62.67 33.97,64.33 32.13,66.17 CL1.2
  other vias: 28.57,43.81 28.57,43.18 33.66,44.45 31.75,44.45 21.59,75.56 21.59,76.2 33.66,62.23 30.48,76.2 30.48,76.83 35.56,74.04
  pour Bottom: 20.32,39.37 39.37,39.37 39.37,77.47 20.32,77.47
  pour Top: 20.32,39.37 39.37,39.37 39.37,77.47 20.32,77.47
GND7  (via drill 0.35, 0.38)
  Top 0.381: C19.2 45.09,41.15 45.34,40.89 C20.- 44.96,41.02 42.93,41.02 SV5.5 | v51.12,41.59 CR2.2 | C21.2 56.52,72.39 54.67,74.23 54.04,74.23 | 54.04,74.23 53.66,74.23 v53.15,74.74 | v53.34,67.31 BUS2.6 53.47,70.1 v53.47,72.33 | v54.04,73.53 54.04,74.23 | v54.36,48.7 54.48,48.7 55.75,49.97 58.99,49.97 59.12,50.1 59.12,56.58 58.67,57.02 v55.82,57.02 | v54.93,57.91 54.93,59.88 v54.17,60.64
  Bottom 0.381: SV5.5 46.67,40.64 47.62,41.59 v51.12,41.59 51.24,41.72 53.28,41.72 54.36,42.8 v54.36,48.7 | PAD26.1 v53.15,74.74 | CL2.2 51.12,66.04 50.23,66.93 49.97,66.93 IC7.5 | v53.34,67.31 CL2.2 | v54.04,73.53 54.04,72.9 v53.47,72.33 | v54.93,57.91 v55.82,57.02 | v54.17,60.64 54.17,62.55 54.29,62.67 54.29,64.33 52.45,66.17 CL2.2